# Altium PCB CAMERA.PcbDoc (part 1 of 2)
Units mm, origin at the board's own origin, x right, y up, seen from the top; angles counter-clockwise.
Board outline 40.01 x 40 mm, 8 copper layers (L1-TOP, L2-GND/PWR, L3-GND, L4-SIGNAL, L5-SIGNAL, L6-GND, L7-GND/PWR, L8-BOT), stack 1.6 mm thick; 313 components, 254 nets, 1654 pads, 0 vias.
Unrouted connection lines stored in the file: 1132.
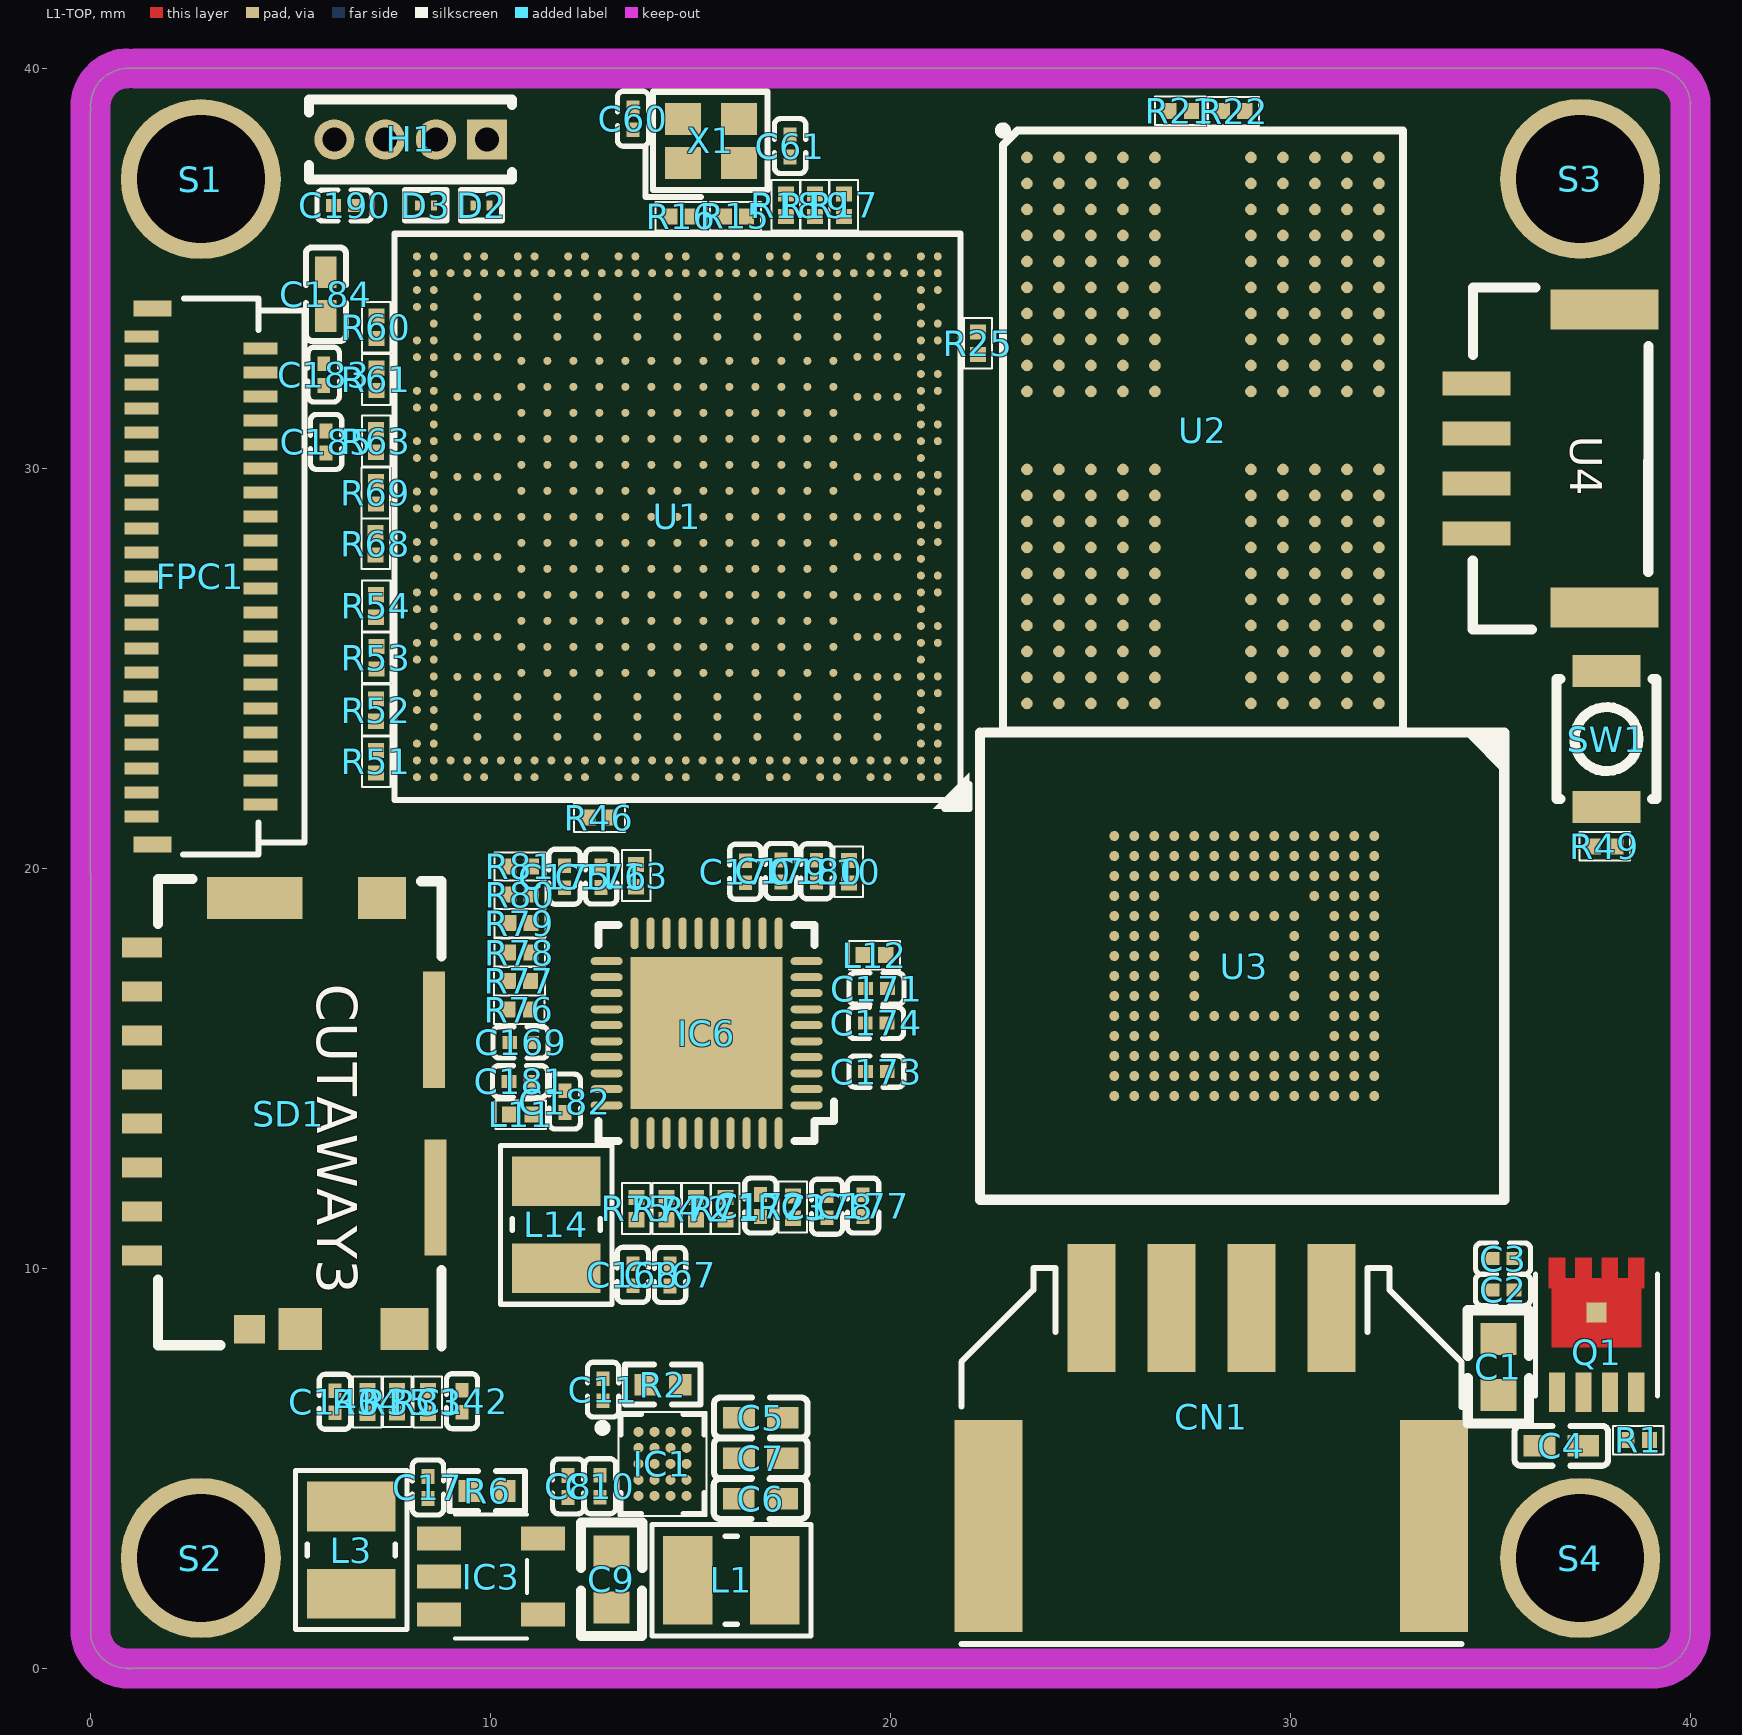
[diagram p0: L1-TOP view]
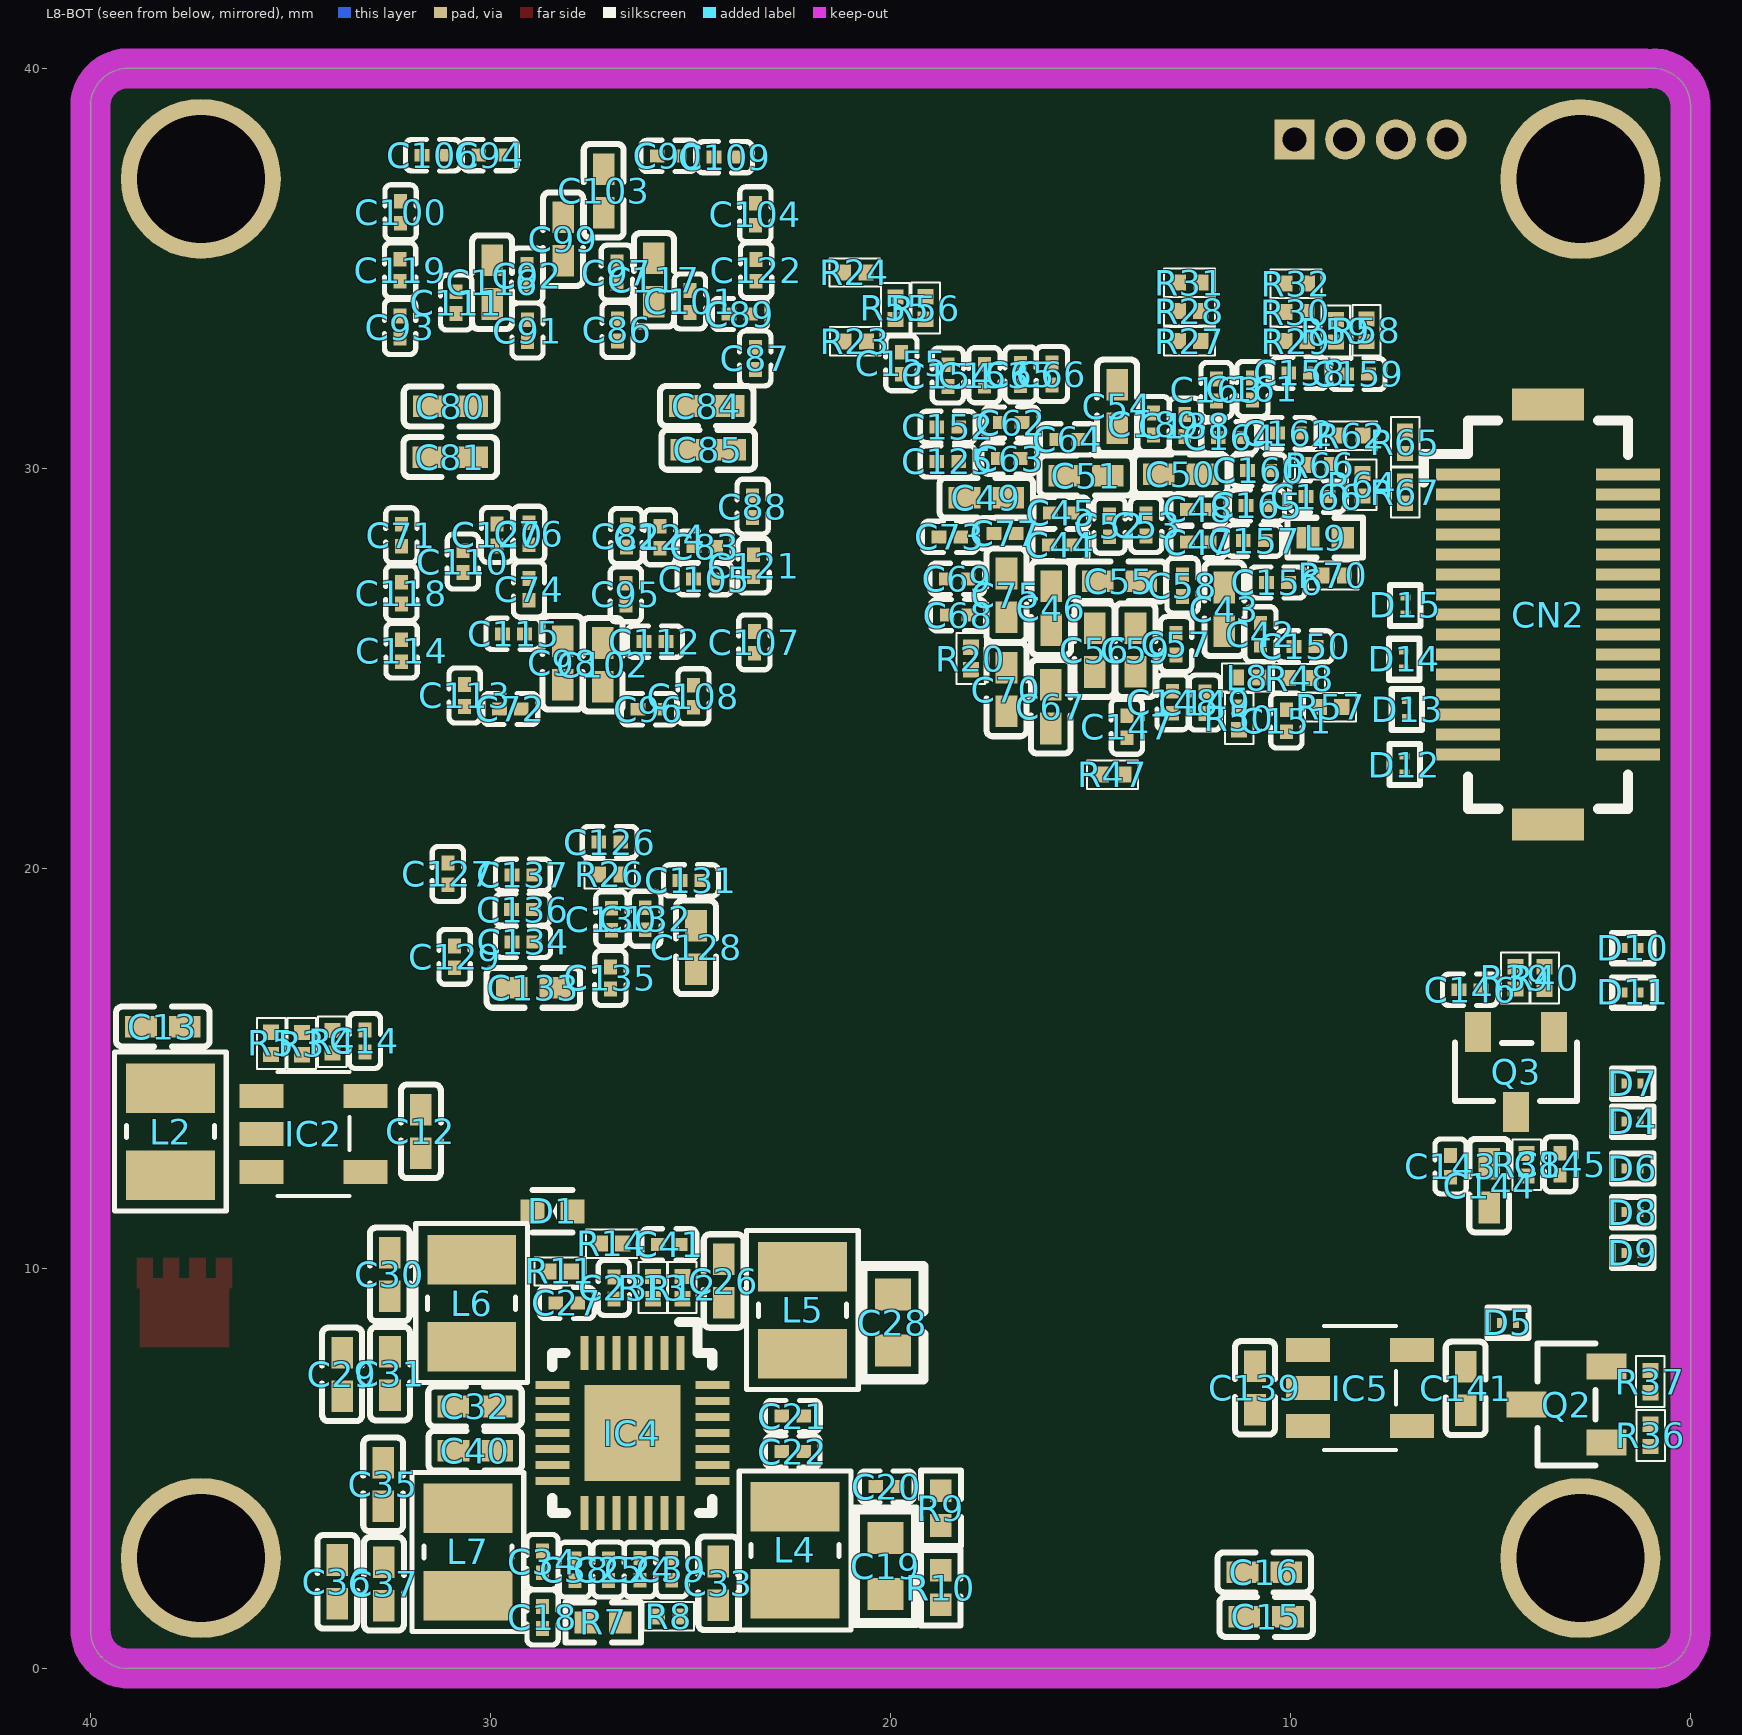
[diagram p1: L8-BOT view, seen from below]

## Layer stack, top to bottom
Top Solder: solder mask 0.0102, Solder Resist, Dk 3.5
L1-TOP: signal copper 0.035
Dielectric 1: prepreg 0.1164, 2116*1, Dk 4.1
L2-GND/PWR: signal copper 0.0152
Dielectric 2: core 0.3, Core-030, Dk 4.3
L3-GND: signal copper 0.0152
Dielectric 3: prepreg 0.0764, 1080*1, Dk 4.1
Dielectric 4: prepreg 0.0764, 1080*1, Dk 4.1
L4-SIGNAL: signal copper 0.0152
Dielectric 5: core 0.3, Core-030, Dk 4.3
L5-SIGNAL: signal copper 0.0152
Dielectric 6: prepreg 0.0764, 1080*1, Dk 4.1
Dielectric 7: prepreg 0.0764, 1080*1, Dk 4.1
L6-GND: signal copper 0.0152
Dielectric 8: core 0.3, Core-030, Dk 4.3
L7-GND/PWR: signal copper 0.0152
Dielectric 9: dielectric 0.1164, 2116*1, Dk 4.8
L8-BOT: signal copper 0.035
Bottom Solder: solder mask 0.0102, Solder Resist, Dk 3.5

## Board outline
0,0.889 ccw(c0.953,0.953) 1.016,0 0.884,0.005 39.111,0.005 39.106,0 ccw(c39.042,0.953) 39.995,1.016 39.995,39.204 40.005,39.116 ccw(c39.052,39.052) 38.989,40.005 0.889,40.005 ccw(c0.952,39.052) 0,38.989 -0.005,38.857

## Design rules (kind name [scope] priority, off if disabled: settings)
Clearance [All] p1: gap=0.254 ignorepadtopadclearanceinfootprint=TRUE
DiffPairsRouting [All] p1: maxlimit=0.254 minlimit=0.254 mostfreqgap=0.254 toplayer_minwidth=0.381 toplayer_maxwidth=0.381 toplayer_prefwidth=0.381 midlayer1_minwidth=0.381 midlayer1_maxwidth=0.381 midlayer1_prefwidth=0.381 midlayer2_minwidth=0.381 midlayer2_maxwidth=0.381 midlayer2_prefwidth=0.381 midlayer3_minwidth=0.381 midlayer3_maxwidth=0.381 midlayer3_prefwidth=0.381 midlayer4_minwidth=0.381 midlayer4_maxwidth=0.381 midlayer4_prefwidth=0.381 midlayer5_minwidth=0.381 midlayer5_maxwidth=0.381 midlayer5_prefwidth=0.381 midlayer6_minwidth=0.381 midlayer6_maxwidth=0.381 midlayer6_prefwidth=0.381 bottomlayer_minwidth=0.381 bottomlayer_maxwidth=0.381 bottomlayer_prefwidth=0.381 maxuncoupledlength=12.7
PolygonConnect [All] p1: connectstyle=Relief reliefconductorwidth=0.254 reliefentries=4 polygonreliefangle="90 Angle" airgapwidth=0.254
RoutingVias [All] p1: holewidth=0.711 width=1.27 viastyle="Through Hole" minholewidth=0.711 minwidth=1.27 maxholewidth=0.711 maxwidth=1.27
SolderMaskExpansion [All] p1: expansion=0.102 istentingtop=FALSE
SupplyNets "Schematic Supply Nets_20" [InNet('3V3SYS')] p1: voltage=0.000
SupplyNets "Schematic Supply Nets_19" [InNet('5VIN')] p2: voltage=0.000
SupplyNets "Schematic Supply Nets_18" [InNet('VCC3V3_SD')] p3: voltage=0.000
SupplyNets "Schematic Supply Nets_17" [InNet('VDD_NPU')] p4: voltage=0.000
SupplyNets "Schematic Supply Nets_16" [InNet('DVDD10')] p5: voltage=0.000
SupplyNets "Schematic Supply Nets_15" [InNet('VDD_VEPU_LOGIC')] p6: voltage=0.000
SupplyNets "Schematic Supply Nets_14" [InNet('VCC_1V8A')] p7: voltage=0.000
SupplyNets "Schematic Supply Nets_13" [InNet('VCC3V3')] p8: voltage=0.000
SupplyNets "Schematic Supply Nets_12" [InNet('VCC0V6_DDR')] p9: voltage=0.000
SupplyNets "Schematic Supply Nets_11" [InNet('VCC_1V8')] p10: voltage=0.000
SupplyNets "Schematic Supply Nets_10" [InNet('RGMII_1V')] p11: voltage=0.000
SupplyNets "Schematic Supply Nets_9" [InNet('VCC_DDR')] p12: voltage=0.000
SupplyNets "Schematic Supply Nets_8" [InNet('VDD_ARM')] p13: voltage=0.000
SupplyNets "Schematic Supply Nets_7" [InNet('VCCIO_SD')] p14: voltage=0.000
SupplyNets "Schematic Supply Nets_6" [InNet('AVDD33')] p15: voltage=0.000
SupplyNets "Schematic Supply Nets_5" [InNet('5VSYS')] p16: voltage=0.000
SupplyNets "Schematic Supply Nets_4" [InNet('AVDD10')] p17: voltage=0.000
SupplyNets "Schematic Supply Nets_3" [InNet('GND')] p18: voltage=0.000
SupplyNets "Schematic Supply Nets_2" [InNet('VCC0V9')] p19: voltage=0.000
SupplyNets "Schematic Supply Nets_1" [InNet('0V9')] p20: voltage=0.000
SupplyNets "Schematic Supply Nets" [InNet('DVDD33')] p21: voltage=0.000
Width [All] p1: maxlimit=0.254 minlimit=0.254 preferedwidth=0.254
29 further rules are at their usual default settings.

## Classes and differential pairs
differential pair class USB_DIFF_90OHM: USB_DRD USB_HOST
differential pair class PHY_DIFF_100: MDI0 MDI1 MDI2 MDI3
differential pair class DIFF100_DDR_DQS: DDRA_DQS0 DDRA_DQS1 DDRB_DQS0 DDRB_DQS1
differential pair class DIFF100_DDR_CLK: DDRA_CLK DDRB_CLK
differential pair class CSI_DIFF_100OHM: MIPI_CSI_RX0_CLK0 MIPI_CSI_RX0_D0 MIPI_CSI_RX0_D1 MIPI_CSI_RX0_D2 MIPI_CSI_RX0_D3 MIPI_CSI_RX1_CLK0 MIPI_CSI_RX1_D0 MIPI_CSI_RX1_D1 MIPI_CSI_RX1_D2 MIPI_CSI_RX1_D3
net class USB_DIFF_CLASS: NetD12_2 NetD13_2 NetD14_2 NetD15_2 USB_DRD_N USB_DRD_P USB_HOST_N USB_HOST_P
net class SDMMC1_50OHM: SDMMC1_CLK SDMMC1_CMD SDMMC1_D0 SDMMC1_D1 SDMMC1_D2 SDMMC1_D3
net class SDIO_50OHM: SDMMC0_CLK SDMMC0_CMD SDMMC0_D0 SDMMC0_D1 SDMMC0_D2 SDMMC0_D3
net class MAC_50OHM: ETH_CLK_25M ETH_MDC_M0 ETH_MDIO ETH_RX0_M0 ETH_RX1_M0 ETH_RX2_M0 ETH_RX3_M0 ETH_RXCLK_M0 ETH_RXCTL_M0 ETH_TX0_M0 ETH_TX1_M0 ETH_TX2_M0 ETH_TX3_M0 ETH_TXCLK_M0 ETH_TXCTL_M0 RGMII_INT RSTB
net class EMMC_50OHM: EMMC_CLK EMMC_CMD EMMC_D0 EMMC_D1 EMMC_D2 EMMC_D3 EMMC_D4 EMMC_D5 EMMC_D6 EMMC_D7 NetR25_1
net class DIFF_PAIR_CLASS: DDRA_CLK_N DDRA_CLK_P DDRA_DQS0_N DDRA_DQS0_P DDRA_DQS1_N DDRA_DQS1_P DDRB_CLK_N DDRB_CLK_P DDRB_DQS0_N DDRB_DQS0_P DDRB_DQS1_N DDRB_DQS1_P
net class DDR_DM_50OHM: DDRA_DM0 DDRA_DM1 DDRB_DM0 DDRB_DM1
net class DDR_DATABIT_50OHM: DDRA_D0 DDRA_D1 DDRA_D2 DDRA_D3 DDRA_D4 DDRA_D5 DDRA_D6 DDRA_D7 DDRA_D8 DDRA_D9 DDRA_D10 DDRA_D11 DDRA_D12 DDRA_D13 DDRA_D14 DDRA_D15 DDRB_D0 DDRB_D1 DDRB_D2 DDRB_D3 DDRB_D4 DDRB_D5 DDRB_D6 DDRB_D7 DDRB_D8 DDRB_D9 DDRB_D10 DDRB_D11 DDRB_D12 DDRB_D13 DDRB_D14 DDRB_D15
net class DDR_CTRL_50OHM: DDRA_CKE0 DDRA_CKE1 DDRA_CS0 DDRA_CS1 DDRB_CKE0 DDRB_CKE1 DDRB_CS0 DDRB_CS1
net class DDR_A_50OHM: DDRA_A0 DDRA_A1 DDRA_A2 DDRA_A3 DDRA_A4 DDRA_A5 DDRB_A0 DDRB_A1 DDRB_A2 DDRB_A3 DDRB_A4 DDRB_A5
net class CSI_DIFF_CLASS: MIPI_CSI_RX0_CLK0_N MIPI_CSI_RX0_CLK0_P MIPI_CSI_RX0_D0_N MIPI_CSI_RX0_D0_P MIPI_CSI_RX0_D1_N MIPI_CSI_RX0_D1_P MIPI_CSI_RX0_D2_N MIPI_CSI_RX0_D2_P MIPI_CSI_RX0_D3_N MIPI_CSI_RX0_D3_P MIPI_CSI_RX1_CLK0_N MIPI_CSI_RX1_CLK0_P MIPI_CSI_RX1_D0_N MIPI_CSI_RX1_D0_P MIPI_CSI_RX1_D1_N MIPI_CSI_RX1_D1_P MIPI_CSI_RX1_D2_N MIPI_CSI_RX1_D2_P MIPI_CSI_RX1_D3_N MIPI_CSI_RX1_D3_P
component class "USB 2.0 CONTROLLER": C152 C153 C154 C155 D12 D13 D14 D15 R51 R52 R53 R54 R55 R56
component class "SDRAM RV1126B": C67 C68 C69 C70 C73 C75 C77 R20
component class "SDMMC RV1126B": C138 C139 C140 C141 C142 IC5 Q2 R27 R28 R29 R30 R31 R32 R33 R34 R35 R36 R37
component class SDMMC1: C147 R46 R47
component class SDCARD: C143 C144 C145 C146 D4 D5 D6 D7 D8 D9 D10 D11 Q3 R38 R39 R40 SD1
component class SARADC: C148 C149 C150 C151 L8 R48 R49 R50 SW1
component class "RV1126B EMMC": C125 R23 R24 R25
component class RGMII: C165 C166 L9 R62 R63 R64 R65 R66 R67 R68 R69 R70
component class RGMII_PHY: C167 C168 C169 C170 C171 C172 C173 C174 C175 C176 C177 C178 C179 C180 C181 C182 IC6 L10 L11 L12 L13 L14 R71 R72 R73 R74 R75 R76 R77 R78 R79 R80 R81
component class PWR_IN: C1 C2 C3 C4 C5 C6 C7 C8 C9 C10 C11 C12 C13 C14 C15 C16 C17 CN1 D1 IC1 IC2 IC3 L1 L2 L3 Q1 R1 R2 R3 R4 R5 R6
component class "Power Pins Page RV1126": C42 C43 C44 C45 C46 C47 C48 C49 C50 C51 C52 C53 C54 C55 C56 C57 C58 C59
component class PMUIO_BLOCK: C60 C61 C62 C63 C64 C65 C66 C190 D2 D3 H1 R15 R16 R17 R18 R19 X1
component class PMIC: C18 C19 C20 C21 C22 C23 C24 C25 C26 C27 C28 C29 C30 C31 C32 C33 C34 C35 C36 C37 C38 C39 C40 C41 IC4 L4 L5 L6 L7 R7 R8 R9 R10 R11 R12 R13 R14
component class OTHER: C189 S1 S2 S3 S4 U1
component class MIPI_CSI: C158 C159 C160 C161 C162 C163 C164 R58 R59 R60 R61
component class "LPDDR4X SDRAM": C71 C72 C74 C76 C80 C81 C82 C83 C84 C85 C86 C87 C88 C89 C90 C91 C92 C93 C94 C95 C96 C97 C98 C99 C100 C101 C102 C103 C104 C105 C106 C107 C108 C109 C110 C111 C112 C113 C114 C115 C116 C117 C118 C119 C120 C121 C122 C124 R21 R22 U2
component class "EMMC CHIP": C126 C127 C128 C129 C130 C131 C132 C133 C134 C135 C136 C137 R26 U3
component class Connector: C183 C184 C185 CN2 FPC1
component class CANFD: C156 C157 R57 U4
differential pair USB_HOST: +USB_HOST_P -USB_HOST_N
differential pair USB_DRD: +USB_DRD_P -USB_DRD_N
differential pair MIPI_CSI_RX1_D3: +MIPI_CSI_RX1_D3_P -MIPI_CSI_RX1_D3_N
differential pair MIPI_CSI_RX1_D2: +MIPI_CSI_RX1_D2_P -MIPI_CSI_RX1_D2_N
differential pair MIPI_CSI_RX1_D1: +MIPI_CSI_RX1_D1_P -MIPI_CSI_RX1_D1_N
differential pair MIPI_CSI_RX1_D0: +MIPI_CSI_RX1_D0_P -MIPI_CSI_RX1_D0_N
differential pair MIPI_CSI_RX1_CLK0: +MIPI_CSI_RX1_CLK0_P -MIPI_CSI_RX1_CLK0_N
differential pair MIPI_CSI_RX0_D3: +MIPI_CSI_RX0_D3_P -MIPI_CSI_RX0_D3_N
differential pair MIPI_CSI_RX0_D2: +MIPI_CSI_RX0_D2_P -MIPI_CSI_RX0_D2_N
differential pair MIPI_CSI_RX0_D1: +MIPI_CSI_RX0_D1_P -MIPI_CSI_RX0_D1_N
differential pair MIPI_CSI_RX0_D0: +MIPI_CSI_RX0_D0_P -MIPI_CSI_RX0_D0_N
differential pair MIPI_CSI_RX0_CLK0: +MIPI_CSI_RX0_CLK0_P -MIPI_CSI_RX0_CLK0_N
differential pair MDI3: +MDI3_P -MDI3_N
differential pair MDI2: +MDI2_P -MDI2_N
differential pair MDI1: +MDI1_P -MDI1_N
differential pair MDI0: +MDI0_P -MDI0_N
differential pair DDRB_DQS1: +DDRB_DQS1_P -DDRB_DQS1_N
differential pair DDRB_DQS0: +DDRB_DQS0_P -DDRB_DQS0_N
differential pair DDRB_CLK: +DDRB_CLK_P -DDRB_CLK_N
differential pair DDRA_DQS1: +DDRA_DQS1_P -DDRA_DQS1_N
differential pair DDRA_DQS0: +DDRA_DQS0_P -DDRA_DQS0_N
differential pair DDRA_CLK: +DDRA_CLK_P -DDRA_CLK_N

## Components (designator, comment, footprint, x,y, rotation, side; value= is the part's Value field where it differs from the comment)
C1 "22uF" C0603 35.194,7.538 r90 top
C2 "0.1uF" C0201 35.312,9.466 r0 top
C3 "1uF" C0201 35.313,10.248 r0 top
C4 "4.7uF" C0402#1 36.77,5.569 r180 top
C5 "22uF" C0402#1 16.756,6.273 r0 top
C6 "22uF" C0402#1 16.75,4.242 r0 top
C7 "22uF" C0402#1 16.756,5.257 r0 top
C8 "0.1uF" C0201 11.942,4.553 r270 top
C9 "22uF" C0603 13.023,2.232 r90 top
C10 "0.1uF" C0201 12.742,4.558 r270 top
C11 "0.1uF" C0201 12.814,6.972 r90 top
C12 "10uF" C0402#2 31.741,13.429 r270 bottom
C13 "22uF" C0402#2 38.194,16.048 r180 bottom
C14 "22pF" C0201 33.141,15.689 r90 bottom
C15 "10uF" C0402#2 10.608,1.291 r0 bottom
C16 "22uF" C0402#2 10.655,2.404 r0 bottom
C17 "0.1uF" C0201 8.435,4.526 r270 top
C18 "0.1uF" C0201 28.7,1.276 r270 bottom
C19 "22uF" C0603 20.125,2.56 r270 bottom
C20 "47pF" C0201 20.096,4.549 r180 bottom
C21 "1uF" C0201 22.445,6.31 r0 bottom
C22 "1uF" C0201 22.447,5.421 r0 bottom
C23 "1uF" C0201 26.918,9.515 r270 bottom
C24 "1uF" C0201 26.267,2.479 r90 bottom
C25 "1uF" C0201 27.049,2.473 r90 bottom
C26 "10uF" C0402#2 24.171,9.688 r270 bottom
C27 "1uF" C0201 28.094,9.142 r180 bottom
C28 "22uF" C0603 19.941,8.647 r90 bottom
C29 "22uF" C0402#2 33.71,7.354 r90 bottom
C30 "22uF" C0402#2 32.517,9.854 r270 bottom
C31 "22uF" C0402#2 32.513,7.372 r90 bottom
C32 "10uF" C0402#2 30.387,6.552 r0 bottom
C33 "10uF" C0402#2 24.307,2.13 r90 bottom
C34 "0.1uF" C0201 28.7,2.665 r90 bottom
C35 "22uF" C0402#2 32.682,4.602 r270 bottom
C36 "22uF" C0402#2 33.83,2.167 r90 bottom
C37 "22uF" C0402#2 32.667,2.116 r90 bottom
C38 "1uF" C0201 27.89,2.471 r90 bottom
C39 "1uF" C0201 25.469,2.48 r90 bottom
C40 "10uF" C0402#2 30.38,5.445 r0 bottom
C41 "1uF" C0201 25.531,10.606 r0 bottom
C42 "0.1uF" C0201 10.751,25.857 r90 bottom
C43 "10uF" C0402#2 11.656,26.48 r90 bottom
C44 "1uF" C0201 15.751,28.09 r0 bottom
C45 "0.1uF" C0201 15.729,28.893 r0 bottom
C46 "10uF" C0402#2 15.982,26.507 r90 bottom
C47 "1uF" C0201 12.303,28.158 r0 bottom
C48 "0.1uF" C0201 12.303,28.978 r0 bottom
C49 "10uF" C0402#2 17.604,29.268 r180 bottom
C50 "10uF" C0402#2 12.746,29.856 r0 bottom
C51 "4.7uF" C0402#2 15.11,29.824 r180 bottom
C52 "1uF" C0201 14.524,28.57 r90 bottom
C53 "0.1uF" C0201 13.608,28.587 r90 bottom
C54 "10uF" C0402#2 14.335,31.552 r270 bottom
C55 "10uF" C0402#2 14.278,27.18 r0 bottom
C56 "10uF" C0402#2 14.899,25.458 r90 bottom
C57 "1uF" C0201 12.86,25.611 r90 bottom
C58 "0.1uF" C0201 12.699,27.072 r90 bottom
C59 "10uF" C0402#2 13.875,25.46 r90 bottom
C60 "15pF" C0201 13.563,38.745 r270 top
C61 "15pF" C0201 17.491,38.062 r270 top
C62 "1uF" C0201 16.985,31.146 r180 bottom
C63 "0.1uF" C0201 17.029,30.25 r180 bottom
C64 "0.1uF" C0201 15.57,30.731 r0 bottom
C65 "0.1uF" C0201 16.746,32.351 r270 bottom
C66 "0.1uF" C0201 15.965,32.362 r270 bottom
C67 "10uF" C0402#2 15.994,24.046 r90 bottom
C68 "1uF" C0201 18.31,26.335 r180 bottom
C69 "0.1uF" C0201 18.334,27.242 r180 bottom
C70 "10uF" C0402#2 17.101,24.475 r90 bottom
C71 "0.1uF" C0201 32.23,28.331 r90 bottom
C72 "0.1uF" C0201 29.504,23.989 r0 bottom
C73 "0.1uF" C0201 18.517,28.293 r180 bottom
C74 "0.1uF" C0201 29.038,26.979 r90 bottom
C75 "10uF" C0402#2 17.101,26.83 r90 bottom
C76 "0.1uF" C0201 29.037,28.371 r90 bottom
C77 "0.1uF" C0201 17.137,28.381 r180 bottom
C80 "22uF" C0402#2 31,31.552 r0 bottom
C81 "10uF" C0402#2 31.006,30.286 r0 bottom
C82 "1uF" C0201 26.605,28.313 r90 bottom
C83 "0.1uF" C0201 24.642,28.045 r180 bottom
C84 "22uF" C0402#2 24.593,31.562 r180 bottom
C85 "10uF" C0402#2 24.556,30.468 r180 bottom
C86 "1uF" C0201 26.826,33.463 r90 bottom
C87 "0.1uF" C0201 23.381,32.753 r90 bottom
C88 "0.1uF" C0201 23.446,29.047 r270 bottom
C89 "0.1uF" C0201 23.767,33.863 r0 bottom
C90 "0.1uF" C0201 25.555,37.815 r0 bottom
C91 "0.1uF" C0201 29.075,33.448 r270 bottom
C92 "0.1uF" C0201 29.084,34.824 r270 bottom
C93 "0.1uF" C0201 32.262,33.537 r270 bottom
C94 "0.1uF" C0201 30.021,37.837 r180 bottom
C95 "0.1uF" C0201 26.616,26.855 r90 bottom
C96 "0.1uF" C0201 26.041,23.982 r180 bottom
C97 "0.1uF" C0201 26.841,34.898 r270 bottom
C98 "22uF" C0402#2 28.199,25.139 r270 bottom
C99 "10uF" C0402#2 28.186,35.736 r90 bottom
C100 "1uF" C0201 32.249,36.406 r270 bottom
C101 "0.1uF" C0201 25.014,34.178 r90 bottom
C102 "22uF" C0402#2 27.196,25.093 r270 bottom
C103 "10uF" C0402#2 27.17,36.941 r270 bottom
C104 "1uF" C0201 23.378,36.356 r270 bottom
C105 "0.1uF" C0201 24.651,27.235 r0 bottom
C106 "0.1uF" C0201 31.44,37.832 r180 bottom
C107 "0.1uF" C0201 23.405,25.654 r90 bottom
C108 "0.1uF" C0201 24.926,24.305 r90 bottom
C109 "0.1uF" C0201 24.141,37.783 r0 bottom
C110 "0.1uF" C0201 30.69,27.673 r270 bottom
C111 "0.1uF" C0201 30.858,34.147 r90 bottom
C112 "0.1uF" C0201 25.89,25.673 r0 bottom
C113 "0.1uF" C0201 30.646,24.326 r90 bottom
C114 "0.1uF" C0201 32.221,25.447 r90 bottom
C115 "0.1uF" C0201 29.425,25.867 r180 bottom
C116 "22uF" C0402#2 29.961,34.659 r270 bottom
C117 "10uF" C0402#2 25.917,34.716 r270 bottom
C118 "1uF" C0201 32.23,26.884 r90 bottom
C119 "0.1uF" C0201 32.259,34.955 r270 bottom
C120 "0.1uF" C0201 29.837,28.34 r270 bottom
C121 "0.1uF" C0201 23.422,27.572 r270 bottom
C122 "0.1uF" C0201 23.36,34.954 r270 bottom
C124 "0.1uF" C0201 25.763,28.282 r270 bottom
C125 "0.1uF" C0201 18.568,30.179 r180 bottom
C126 "0.1uF" C0201 27.019,20.663 r0 bottom
C127 "0.1uF" C0201 31.066,19.866 r90 bottom
C128 "10uF" C0402#2 24.863,18.027 r90 bottom
C129 "1uF" C0201 30.897,17.792 r90 bottom
C130 "0.1uF" C0201 26.977,18.732 r90 bottom
C131 "0.1uF" C0201 24.991,19.703 r0 bottom
C132 "0.1uF" C0201 26.132,18.743 r90 bottom
C133 "10uF" C0402#2 28.928,17.018 r180 bottom
C134 "1uF" C0201 29.187,18.163 r0 bottom
C135 "0.1uF" C0201 27.001,17.264 r270 bottom
C136 "0.1uF" C0201 29.199,18.973 r0 bottom
C137 "0.1uF" C0201 29.192,19.842 r0 bottom
C138 "0.1uF" C0201 12.644,31.074 r270 bottom
C139 "4.7uF" C0402#2 10.889,7.016 r90 bottom
C140 "1nF" C0201 6.109,6.668 r90 top
C141 "4.7uF" C0402#2 5.621,7.004 r270 bottom
C142 "1nF" C0201 9.287,6.684 r270 top
C143 "0.1uF" C0201 5.999,12.553 r90 bottom
C144 "4.7uF" C0402#2 5.033,12.071 r90 bottom
C145 "0.1uF" C0201 3.26,12.606 r90 bottom
C146 "0.1uF" C0201 5.512,16.969 r0 bottom
C147 "0.1uF" C0201 14.092,23.544 r90 bottom
C148 "0.1uF" C0201 12.947,24.157 r90 bottom
C149 "1uF" C0201 12.139,24.148 r270 bottom
C150 "1nF" C0201 9.639,25.552 r0 bottom
C151 "1nF" C0201 10.102,23.697 r270 bottom
C152 "0.1uF" C0201 18.57,31.04 r180 bottom
C153 "0.1uF" C0201 17.654,32.334 r270 bottom
C154 "0.1uF" C0201 18.568,32.323 r270 bottom
C155 "0.1uF" C0201 19.729,32.631 r90 bottom
C156 "0.1uF" C0201 10.326,27.151 r0 bottom
C157 "0.1uF" C0201 10.907,28.198 r0 bottom
C158 "0.1uF" C0201 9.773,32.39 r0 bottom
C159 "0.1uF" C0201 8.326,32.365 r180 bottom
C160 "0.1uF" C0201 10.799,29.956 r0 bottom
C161 "0.1uF" C0201 10.953,31.989 r270 bottom
C162 "0.1uF" C0201 10.053,30.884 r0 bottom
C163 "0.1uF" C0201 11.851,31.964 r270 bottom
C164 "0.1uF" C0201 11.531,30.779 r0 bottom
C165 "0.1uF" C0201 10.838,29.076 r0 bottom
C166 "0.1uF" C0201 9.34,29.3 r0 bottom
C167 "1uF" C0201 14.488,9.84 r270 top
C168 "0.1uF" C0201 13.557,9.843 r270 top
C169 "0.1uF" C0201 10.753,15.654 r0 top
C170 "0.1uF" C0201 16.369,19.92 r90 top
C171 "1uF" C0201 19.65,16.997 r180 top
C172 "0.1uF" C0201 16.746,11.574 r90 top
C173 "0.1uF" C0201 19.646,14.924 r180 top
C174 "0.1uF" C0201 19.64,16.141 r180 top
C175 "0.1uF" C0201 11.853,19.796 r270 top
C176 "1uF" C0201 12.767,19.798 r270 top
C177 "1uF" C0201 19.316,11.572 r90 top
C178 "0.1uF" C0201 18.412,11.545 r90 top
C179 "1uF" C0201 17.265,19.939 r270 top
C180 "0.1uF" C0201 18.15,19.932 r270 top
C181 "0.1uF" C0201 10.738,14.68 r0 top
C182 "1uF" C0201 11.857,14.173 r90 top
C183 "0.1uF" C0201 5.831,32.347 r90 top
C184 "10uF" C0402#1 5.885,34.359 r270 top
C185 "0.1uF" C0201 5.891,30.664 r270 top
C189 "0.1uF" C0201 13.424,31.112 r90 bottom
C190 "0.1uF" C0201 6.35,36.576 r0 top
CN1 "SMD,P=2mm,Surface Mount,Right Angle" CONN-SMD_4P-P2.00_WTBA0-BH004 28.02,6.29 r180 top
CN2 "DF12NB(3.0)-30DP-0.5V(51)" CONN-SMD_30P-P0.50_HRS_DF12NB-3.0-30DP-0.5V 3.569,26.346 r270 bottom
D1 "TVS DIODE 5VWM 10VC X1-SON-2(0.6x1)" X1SON-2_L1.0-W0.6-P0.65-BI-1 28.448,11.43 r180 bottom
D2 "ESD DIODE" DSN0603-2_L0.7-W0.3-P0.40-BI 9.779,36.576 r0 top
D3 "ESD DIODE" DSN0603-2_L0.7-W0.3-P0.40-BI 8.382,36.576 r0 top
D4 "ESD DIODE" DSN0603-2_L0.7-W0.3-P0.40-BI 1.446,13.67 r0 bottom
D5 "ESD DIODE" DSN0603-2_L0.7-W0.3-P0.40-BI 4.565,8.644 r180 bottom
D6 "ESD DIODE" DSN0603-2_L0.7-W0.3-P0.40-BI 1.446,12.505 r0 bottom
D7 "ESD DIODE" DSN0603-2_L0.7-W0.3-P0.40-BI 1.446,14.624 r0 bottom
D8 "ESD DIODE" DSN0603-2_L0.7-W0.3-P0.40-BI 1.446,11.412 r0 bottom
D9 "ESD DIODE" DSN0603-2_L0.7-W0.3-P0.40-BI 1.446,10.394 r0 bottom
D10 "ESD DIODE" DSN0603-2_L0.7-W0.3-P0.40-BI 1.446,18.016 r0 bottom
D11 "ESD DIODE" DSN0603-2_L0.7-W0.3-P0.40-BI 1.446,16.903 r0 bottom
D12 "ESD DIODE" DSN0603-2_L0.7-W0.3-P0.40-BI 7.151,22.599 r270 bottom
D13 "ESD DIODE" DSN0603-2_L0.7-W0.3-P0.40-BI 7.086,23.982 r90 bottom
D14 "ESD DIODE" DSN0603-2_L0.7-W0.3-P0.40-BI 7.161,25.229 r270 bottom
D15 "ESD DIODE" DSN0603-2_L0.7-W0.3-P0.40-BI 7.128,26.576 r90 bottom
FPC1 "FH35C-41S-0.3SHW(50)" FPC-SMD_FH35C-41S-0.3SHW-50 2.746,27.305 r270 top
H1 "Through Hole,P=1.27mm" HDR-TH_4P-P1.27-V-M 8.001,38.227 r180 top
IC1 "SYR838PKC" BGA-20_L15.6-W2.0-R4-C6-P0.40-BL 14.299,5.118 r270 top
IC2 "SY8089A1AAC" SOT-23-5_L3.0-W1.7-P0.95-LS2.8-BR 34.425,13.364 r0 bottom
IC3 "SY8089A1AAC" SOT-23-5_L3.0-W1.7-P0.95-LS2.8-BR 10.012,2.297 r180 top
IC4 "RK801-2" QFN-28_L4.0-W4.0-P0.40-TL-EP2.4 26.456,5.887 r270 bottom
IC5 "LP3983SAB5F-08" SOT-23-5_L3.0-W1.7-P0.95-LS2.8-BR 8.258,7.01 r0 bottom
IC6 "RTL8211F-CG" WQFN-40_L5.0-W5.0-P0.4-BL-EP 15.403,15.882 r90 top
L1 "FTC252012SR47MBCA" IND_1008 16.018,2.206 r0 top
L2 "APH252012C1R0MP01" IND_1008 37.999,13.421 r90 bottom
L3 "APH252012C1R0MP01" IND_1008 6.518,2.96 r90 top
L4 "FTC252012SR47MBCA" IND_1008 22.39,2.955 r270 bottom
L5 "FTC252012SR47MBCA" IND_1008 22.199,8.958 r90 bottom
L6 "PSTMAA252012-2R2MB" IND_1008 30.471,9.132 r90 bottom
L7 "PSTMAA252012-2R2MB" IND_1008 30.567,2.914 r270 bottom
L8 "FERRITE BEAD 120Ω 0201 1LN" R0201 11.077,24.776 r0 bottom
L9 "FERRITE BEAD 120Ω 0201 1LN" R0402 9.129,28.27 r180 bottom
L10 "FERRITE BEAD 120Ω 0201 1LN" R0201 18.957,19.92 r270 top
L11 "FERRITE BEAD 120Ω 0201 1LN" R0201 10.754,13.847 r0 top
L12 "FERRITE BEAD 120Ω 0201 1LN" R0201 19.6,17.837 r180 top
L13 "FERRITE BEAD 120Ω 0201 1LN" R0201 13.638,19.822 r270 top
L14 "PSTMAA252012-2R2MB" IND_1008 11.644,11.096 r270 top
Q1 "SI7615CDN-T1-GE3" PowerPAK_1212-8_SMD 37.653,7.901 r90 top
Q2 "N-CHANEL" SOT-23-3_L2.9-W1.3-P1.90-LS2.4-BR 3.097,6.6 r180 bottom
Q3 "P-CHANNEL" SOT-23-3_L2.9-W1.3-P1.90-LS2.4-BR 4.361,14.919 r90 bottom
R1 "200KΩ" R0201 38.691,5.709 r180 top
R2 "23.7kΩ" R0402 14.31,7.097 r0 top
R3 "200KΩ" R0201 34.716,15.623 r270 bottom
R4 "100KΩ" R0201 33.956,15.668 r90 bottom
R5 "10KΩ" R0201 35.487,15.628 r270 bottom
R6 "23.7kΩ" R0402 9.914,4.438 r0 top
R7 "2.2MΩ" R0402 27.185,1.151 r0 bottom
R8 "1MΩ" R0201 25.543,1.304 r0 bottom
R9 "96.5kΩ" R0402 18.74,4.007 r90 bottom
R10 "49.9kΩ" R0402 18.745,2.024 r90 bottom
R11 "4.7kΩ" R0201 28.263,9.926 r0 bottom
R12 "4.7kΩ" R0201 25.206,9.524 r90 bottom
R13 "4.7kΩ" R0201 25.943,9.522 r90 bottom
R14 "4.7KΩ" R0201 26.974,10.621 r0 bottom
R15 "30Ω" R0201 16.121,36.304 r0 top
R16 "1MΩ" R0201 14.764,36.304 r180 top
R17 "510Ω" R0201 18.834,36.583 r90 top
R18 "510Ω" R0201 17.383,36.583 r90 top
R19 "100Ω" R0201 18.108,36.583 r90 top
R20 "120Ω" R0201 17.991,25.25 r270 bottom
R21 "240Ω" R0201 27.244,38.939 r180 top
R22 "240Ω" R0201 28.575,38.935 r0 top
R23 "4.7KΩ" R0201 20.88,33.181 r180 bottom
R24 "4.7KΩ" R0201 20.896,34.901 r180 bottom
R25 "22Ω" R0201 22.187,33.133 r90 top
R26 "10kΩ" R0201 27.019,19.856 r180 bottom
R27 "22Ω" R0201 12.523,33.187 r180 bottom
R28 "22Ω" R0201 12.523,33.932 r180 bottom
R29 "22Ω" R0201 9.86,33.187 r0 bottom
R30 "22Ω" R0201 9.866,33.909 r180 bottom
R31 "22Ω" R0201 12.523,34.645 r0 bottom
R32 "22Ω" R0201 9.861,34.625 r0 bottom
R33 "10kΩ" R0201 8.436,6.663 r270 top
R34 "127KΩ" R0201 6.922,6.664 r90 top
R35 "100KΩ" R0201 7.665,6.668 r270 top
R36 "10kΩ" R0201 0.996,5.829 r90 bottom
R37 "100KΩ" R0201 1.004,7.173 r270 bottom
R38 "10kΩ" R0201 4.099,12.596 r90 bottom
R39 "100KΩ" R0201 4.382,17.265 r90 bottom
R40 "10kΩ" R0201 3.648,17.263 r270 bottom
R46 "22Ω" R0201 12.721,21.271 r0 top
R47 "10kΩ" R0201 14.451,22.35 r0 bottom
R48 "10kΩ" R0201 9.774,24.758 r180 bottom
R49 "100Ω" R0201 37.856,20.552 r0 top
R50 "10kΩ" R0201 11.286,23.751 r270 bottom
R51 "2.2Ω" R0201 7.142,22.669 r90 top
R52 "2.2Ω" R0201 7.139,23.961 r270 top
R53 "2.2Ω" R0201 7.145,25.27 r90 top
R54 "2.2Ω" R0201 7.142,26.562 r270 top
R55 "10kΩ" R0201 19.877,34.007 r90 bottom
R56 "15kΩ" R0201 19.121,34.012 r270 bottom
R57 "4.7KΩ" R0201 8.998,24.037 r180 bottom
R58 "4.7KΩ" R0201 8.101,33.458 r90 bottom
R59 "4.7KΩ" R0201 8.869,33.44 r90 bottom
R60 "22Ω" R0201 7.143,33.532 r90 top
R61 "22Ω" R0201 7.147,32.228 r270 top
R62 "0Ω" R0201 8.476,30.825 r180 bottom
R63 "0Ω" R0201 7.14,30.687 r270 top
R64 "0Ω" R0201 8.206,29.596 r270 bottom
R65 "0Ω" R0201 7.136,30.655 r90 bottom
R66 "0Ω" R0201 9.254,30.084 r180 bottom
R67 "0Ω" R0201 7.133,29.411 r90 bottom
R68 "0Ω" R0201 7.127,28.119 r270 top
R69 "0Ω" R0201 7.132,29.391 r90 top
R70 "1.5kΩ" R0201 8.931,27.326 r180 bottom
R71 "4.7KΩ" R0201 15.873,11.498 r90 top
R72 "4.7KΩ" R0201 15.141,11.498 r90 top
R73 "2.49kΩ" R0201 17.557,11.535 r270 top
R74 "4.7KΩ" R0201 14.401,11.498 r270 top
R75 "0Ω" R0201 13.648,11.498 r270 top
R76 "22Ω" R0201 10.718,16.469 r180 top
R77 "22Ω" R0201 10.721,17.186 r180 top
R78 "22Ω" R0201 10.732,17.9 r180 top
R79 "22Ω" R0201 10.734,18.635 r180 top
R80 "22Ω" R0201 10.738,19.348 r180 top
R81 "22Ω" R0201 10.74,20.051 r180 top
S1 "Screw" "SCREW 3.0" 2.756,37.232 r0 top
S2 "Screw" "SCREW 3.0" 2.756,2.762 r0 top
S3 "Screw" "SCREW 3.0" 37.24,37.24 r0 top
S4 "Screw" "SCREW 3.0" 37.24,2.762 r0 top
SD1 "SD CARD" CONN-SMD_1051620101 4.762,13.895 r270 top
SW1 "B3U-1000P" KEY-SMD_B3U-1000PM 37.902,23.236 r90 top
U1 "IC_RV1126B_C52941026" CCSP-491_L14.0-W14.0-TL_RV1126B 14.671,28.793 r180 top
U2 "AS4C1G32MD4V-046BIN" BGA200C65P12X22_1000X1500X100 27.811,30.952 r0 top
U3 "emmc 16gb" FBGA-153_L13.0-W11.5-P0.50_KLMAG1JETD-B041 28.844,17.562 r270 top
U4 "SM04B-GHS-TB(LF)(SN)" CONN-SMD_4P-P1.25_SM04B-GHS-TB-LF-SN 36.244,30.249 r90 top
X1 "24MHz" CRYSTAL-SMD_4P-L2.0-W1.6-BL 15.507,38.191 r0 top

## Footprints (in the part's own frame and the unit in brackets; to place one, negate y for a bottom-side part, rotate by r counter-clockwise, add the part's x,y. Pads: shape width x height; smd on the part's side, far side on the other; paste and mask are expansions set on the pad)
BGA200C65P12X22_1000X1500X100 [mm]
  round 0.29 smd: A1(-4.4,6.825) A2(-3.6,6.825) A3(-2.8,6.825) A4(-2,6.825) A5(-1.2,6.825) A8(1.2,6.825) A9(2,6.825) A10(2.8,6.825) A11(3.6,6.825) A12(4.4,6.825) AA1(-4.4,-6.175) AA2(-3.6,-6.175) AA3(-2.8,-6.175) AA4(-2,-6.175) AA5(-1.2,-6.175) AA8(1.2,-6.175) AA9(2,-6.175) AA10(2.8,-6.175) AA11(3.6,-6.175) AA12(4.4,-6.175) AB1(-4.4,-6.825) AB2(-3.6,-6.825) AB3(-2.8,-6.825) AB4(-2,-6.825) AB5(-1.2,-6.825) AB8(1.2,-6.825) AB9(2,-6.825) AB10(2.8,-6.825) AB11(3.6,-6.825) AB12(4.4,-6.825) B1(-4.4,6.175) B2(-3.6,6.175) B3(-2.8,6.175) B4(-2,6.175) B5(-1.2,6.175) B8(1.2,6.175) B9(2,6.175) B10(2.8,6.175) B11(3.6,6.175) B12(4.4,6.175) C1(-4.4,5.525) C2(-3.6,5.525) C3(-2.8,5.525) C4(-2,5.525) C5(-1.2,5.525) C8(1.2,5.525) C9(2,5.525) C10(2.8,5.525) C11(3.6,5.525) C12(4.4,5.525) D1(-4.4,4.875) D2(-3.6,4.875) D3(-2.8,4.875) D4(-2,4.875) D5(-1.2,4.875) D8(1.2,4.875) D9(2,4.875) D10(2.8,4.875) D11(3.6,4.875) D12(4.4,4.875) E1(-4.4,4.225) E2(-3.6,4.225) E3(-2.8,4.225) E4(-2,4.225) E5(-1.2,4.225) E8(1.2,4.225) E9(2,4.225) E10(2.8,4.225) E11(3.6,4.225) E12(4.4,4.225) F1(-4.4,3.575) F2(-3.6,3.575) F3(-2.8,3.575) F4(-2,3.575) F5(-1.2,3.575) F8(1.2,3.575) F9(2,3.575) F10(2.8,3.575) F11(3.6,3.575) F12(4.4,3.575) G1(-4.4,2.925) G2(-3.6,2.925) G3(-2.8,2.925) G4(-2,2.925) G5(-1.2,2.925) G8(1.2,2.925) G9(2,2.925) G10(2.8,2.925) G11(3.6,2.925) G12(4.4,2.925) H1(-4.4,2.275) H2(-3.6,2.275) H3(-2.8,2.275) H4(-2,2.275) H5(-1.2,2.275) H8(1.2,2.275) H9(2,2.275) H10(2.8,2.275) H11(3.6,2.275) H12(4.4,2.275) J1(-4.4,1.625) J2(-3.6,1.625) J3(-2.8,1.625) J4(-2,1.625) J5(-1.2,1.625) J8(1.2,1.625) J9(2,1.625) J10(2.8,1.625) J11(3.6,1.625) J12(4.4,1.625) K1(-4.4,0.975) K2(-3.6,0.975) K3(-2.8,0.975) K4(-2,0.975) K5(-1.2,0.975) K8(1.2,0.975) K9(2,0.975) K10(2.8,0.975) K11(3.6,0.975) K12(4.4,0.975) N1(-4.4,-0.975) N2(-3.6,-0.975) N3(-2.8,-0.975) N4(-2,-0.975) N5(-1.2,-0.975) N8(1.2,-0.975) N9(2,-0.975) N10(2.8,-0.975) N11(3.6,-0.975) N12(4.4,-0.975) P1(-4.4,-1.625) P2(-3.6,-1.625) P3(-2.8,-1.625) P4(-2,-1.625) P5(-1.2,-1.625) P8(1.2,-1.625) P9(2,-1.625) P10(2.8,-1.625) P11(3.6,-1.625) P12(4.4,-1.625) R1(-4.4,-2.275) R2(-3.6,-2.275) R3(-2.8,-2.275) R4(-2,-2.275) R5(-1.2,-2.275) R8(1.2,-2.275) R9(2,-2.275) R10(2.8,-2.275) R11(3.6,-2.275) R12(4.4,-2.275) T1(-4.4,-2.925) T2(-3.6,-2.925) T3(-2.8,-2.925) T4(-2,-2.925) T5(-1.2,-2.925) T8(1.2,-2.925) T9(2,-2.925) T10(2.8,-2.925) T11(3.6,-2.925) T12(4.4,-2.925) U1(-4.4,-3.575) U2(-3.6,-3.575) U3(-2.8,-3.575) U4(-2,-3.575) U5(-1.2,-3.575) U8(1.2,-3.575) U9(2,-3.575) U10(2.8,-3.575) U11(3.6,-3.575) U12(4.4,-3.575) V1(-4.4,-4.225) V2(-3.6,-4.225) V3(-2.8,-4.225) V4(-2,-4.225) V5(-1.2,-4.225) V8(1.2,-4.225) V9(2,-4.225) V10(2.8,-4.225) V11(3.6,-4.225) V12(4.4,-4.225) W1(-4.4,-4.875) W2(-3.6,-4.875) W3(-2.8,-4.875) W4(-2,-4.875) W5(-1.2,-4.875) W8(1.2,-4.875) W9(2,-4.875) W10(2.8,-4.875) W11(3.6,-4.875) W12(4.4,-4.875) Y1(-4.4,-5.525) Y2(-3.6,-5.525) Y3(-2.8,-5.525) Y4(-2,-5.525) Y5(-1.2,-5.525) Y8(1.2,-5.525) Y9(2,-5.525) Y10(2.8,-5.525) Y11(3.6,-5.525) Y12(4.4,-5.525)
  silkscreen extent -5.1,-7.5 5,7.6, body extent -5,-7.25 5,7.25, height 0.95
BGA-20_L15.6-W2.0-R4-C6-P0.40-BL [mm]
  round 0.25 smd mask+0.076: A1(-0.8,-0.6) A2(-0.8,-0.2) A3(-0.8,0.2) A4(-0.8,0.6) B1(-0.4,-0.6) B2(-0.4,-0.2) B3(-0.4,0.2) B4(-0.4,0.6) C1(0,-0.6) C2(0,-0.2) C3(0,0.2) C4(0,0.6) D1(0.4,-0.6) D2(0.4,-0.2) D3(0.4,0.2) D4(0.4,0.6) E1(0.8,-0.6) E2(0.8,-0.2) E3(0.8,0.2) E4(0.8,0.6)
  silkscreen extent -1.3,-1.6 1.3,1.1, body extent -1.32,-1.12 1.32,1.12, height 0.56
C0201 [mm]
  rect 0.368x0.324 smd paste-100 mask+0.051: 1(-0.274,0) 2(0.274,0)
  silkscreen extent -0.69,-0.39 0.69,0.39, body extent -0.41,-0.15 0.47,0.15, height 0.31
C0402#1 [mm] "cap"
  rect 0.79x0.54 smd paste+0 mask+0.05: 1(-0.545,0) 2(0.545,0)
  silkscreen extent -1.17,-0.5 1.17,0.5, body extent -0.52,-0.27 0.52,0.26, height 0.53
C0402#2 [mm] "cap"
  rect 0.79x0.54 smd paste+0 mask+0.051: 1(-0.545,0) 2(0.545,0)
  silkscreen extent -1.17,-0.5 1.17,0.5, body extent -0.52,-0.27 0.52,0.26, height 0.53
C0603 [mm] "cap 0603"
  rect 0.8x0.9 smd paste+0 mask+0.051: 1(-0.7,0) 2(0.7,0)
  silkscreen extent -1.41,-0.77 1.42,0.76, body extent -0.81,-0.4 0.79,0.4, height 0.8
CCSP-491_L14.0-W14.0-TL_RV1126B [mm]
  round 0.2 smd paste-100 mask+0.05: A1(-6.51,6.51) A1-2(-5,5.5) A1-4(-4,5.5) A1-6(-3,5.5) A1-8(-2,5.5) A1-10(-1,5.5) A1-12(0,5.5) A1-14(1,5.5) A1-16(2,5.5) A1-18(3,5.5) A1-20(4,5.5) A1-22(5,5.5) A2(-6.09,6.51) A2-1(-3.9,3.9) A2-2(-3.25,3.9) A2-3(-2.6,3.9) A2-4(-1.95,3.9) A2-5(-1.3,3.9) A2-6(-0.65,3.9) A2-7(0,3.9) A2-8(0.65,3.9) A2-9(1.3,3.9) A2-10(1.95,3.9) A2-11(2.6,3.9) A2-12(3.25,3.9) A2-13(3.9,3.9) A4(-5.25,6.51) A5(-4.83,6.51) A7(-3.99,6.51) A8(-3.57,6.51) A10(-2.73,6.51) A11(-2.31,6.51) A13(-1.47,6.51) A14(-1.05,6.51) A16(-0.21,6.51) A17(0.21,6.51) A19(1.05,6.51) A20(1.47,6.51) A22(2.31,6.51) A23(2.73,6.51) A25(3.57,6.51) A26(3.99,6.51) A28(4.83,6.51) A29(5.25,6.51) A31(6.09,6.51) A32(6.51,6.51) AA1(-6.51,-1.89) AA1-2(-5,-4.5) AA1-4(-4,-4.5) AA1-6(-3,-4.5) AA1-8(-2,-4.5) AA1-10(-1,-4.5) AA1-12(0,-4.5) AA1-14(1,-4.5) AA1-16(2,-4.5) AA1-18(3,-4.5) AA1-20(4,-4.5) AA1-22(5,-4.5) AA2(-6.09,-1.89) AA31(6.09,-1.89) AA32(6.51,-1.89) AB1(-6.51,-2.31) AB1-2(-5,-5) AB1-4(-4,-5) AB1-6(-3,-5) AB1-8(-2,-5) AB1-10(-1,-5) AB1-12(0,-5) AB1-14(1,-5) AB1-16(2,-5) AB1-18(3,-5) AB1-20(4,-5) AB1-22(5,-5) AB2(-6.09,-2.31) AB31(6.09,-2.31) AC1-2(-5,-5.5) AC1-4(-4,-5.5) AC1-6(-3,-5.5) AC1-8(-2,-5.5) AC1-10(-1,-5.5) AC1-12(0,-5.5) AC1-14(1,-5.5) AC1-16(2,-5.5) AC1-18(3,-5.5) AC1-20(4,-5.5) AC1-22(5,-5.5) AC2(-6.09,-2.73) AC31(6.09,-2.73) AC32(6.51,-2.73) AD1(-6.51,-3.15) AD2(-6.09,-3.15) AD31(6.09,-3.15) AD32(6.51,-3.15) AE1(-6.51,-3.57) AE2(-6.09,-3.57) AE31(6.09,-3.57) AF2(-6.09,-3.99) AF31(6.09,-3.99) AF32(6.51,-3.99) AG1(-6.51,-4.41) AG2(-6.09,-4.41) AG31(6.09,-4.41) AG32(6.51,-4.41) AH1(-6.51,-4.83) AH2(-6.09,-4.83) AH31(6.09,-4.83) AJ2(-6.09,-5.25) AJ31(6.09,-5.25) AJ32(6.51,-5.25) AK1(-6.51,-5.67) AK2(-6.09,-5.67) AK31(6.09,-5.67) AK32(6.51,-5.67) AL1(-6.51,-6.09) AL2(-6.09,-6.09) AL3(-5.67,-6.09) AL4(-5.25,-6.09) AL5(-4.83,-6.09) AL6(-4.41,-6.09) AL7(-3.99,-6.09) AL8(-3.57,-6.09) AL9(-3.15,-6.09) AL10(-2.73,-6.09) AL11(-2.31,-6.09) AL12(-1.89,-6.09) AL13(-1.47,-6.09) AL14(-1.05,-6.09) AL15(-0.63,-6.09) AL16(-0.21,-6.09) AL17(0.21,-6.09) AL18(0.63,-6.09) AL19(1.05,-6.09) AL20(1.47,-6.09) AL21(1.89,-6.09) AL22(2.31,-6.09) AL23(2.73,-6.09) AL24(3.15,-6.09) AL25(3.57,-6.09) AL26(3.99,-6.09) AL27(4.41,-6.09) AL28(4.83,-6.09) AL29(5.25,-6.09) AL30(5.67,-6.09) AL31(6.09,-6.09) AL32(6.51,-6.09) AM1(-6.51,-6.51) AM2(-6.09,-6.51) AM4(-5.25,-6.51) AM5(-4.83,-6.51) AM7(-3.99,-6.51) AM8(-3.57,-6.51) AM10(-2.73,-6.51) AM11(-2.31,-6.51) AM13(-1.47,-6.51) AM14(-1.05,-6.51) AM16(-0.21,-6.51) AM17(0.21,-6.51) AM19(1.05,-6.51) AM20(1.47,-6.51) AM22(2.31,-6.51) AM23(2.73,-6.51) AM25(3.57,-6.51) AM26(3.99,-6.51) AM28(4.83,-6.51) AM29(5.25,-6.51) AM31(6.09,-6.51) AM32(6.51,-6.51) B1(-6.51,6.09) B1-2(-5,5) B1-4(-4,5) B1-6(-3,5) B1-8(-2,5) B1-10(-1,5) B1-12(0,5) B1-14(1,5) B1-16(2,5) B1-18(3,5) B1-20(4,5) B1-22(5,5) B2(-6.09,6.09) B2-1(-3.9,3.25) B2-2(-3.25,3.25) B2-3(-2.6,3.25) B2-4(-1.95,3.25) B2-5(-1.3,3.25) B2-6(-0.65,3.25) B2-7(0,3.25) B2-8(0.65,3.25) B2-9(1.3,3.25) B2-10(1.95,3.25) B2-11(2.6,3.25) B2-12(3.25,3.25) B2-13(3.9,3.25) B3(-5.67,6.09) B4(-5.25,6.09) B5(-4.83,6.09) B6(-4.41,6.09) B7(-3.99,6.09) B8(-3.57,6.09) B9(-3.15,6.09) B10(-2.73,6.09) B11(-2.31,6.09) B12(-1.89,6.09) B13(-1.47,6.09) B14(-1.05,6.09) B15(-0.63,6.09) B16(-0.21,6.09) B17(0.21,6.09) B18(0.63,6.09) B19(1.05,6.09) B20(1.47,6.09) B21(1.89,6.09) B22(2.31,6.09) B23(2.73,6.09) B24(3.15,6.09) B25(3.57,6.09) B26(3.99,6.09) B27(4.41,6.09) B28(4.83,6.09) B29(5.25,6.09) B30(5.67,6.09) B31(6.09,6.09) B32(6.51,6.09) C1(-6.51,5.67) C1-2(-5,4.5) C1-4(-4,4.5) C1-6(-3,4.5) C1-8(-2,4.5) C1-10(-1,4.5) C1-12(0,4.5) C1-14(1,4.5) C1-16(2,4.5) C1-18(3,4.5) C1-20(4,4.5) C1-22(5,4.5) C2(-6.09,5.67) C2-1(-3.9,2.6) C2-2(-3.25,2.6) C2-3(-2.6,2.6) C2-4(-1.95,2.6) C2-5(-1.3,2.6) C2-6(-0.65,2.6) C2-7(0,2.6) C2-8(0.65,2.6) C2-9(1.3,2.6) C2-10(1.95,2.6) C2-11(2.6,2.6) C2-12(3.25,2.6) C2-13(3.9,2.6) C31(6.09,5.67) C32(6.51,5.67) D1(-6.51,5.25) D1-1(-5.5,4) D1-2(-5,4) D1-3(-4.5,4) D1-21(4.5,4) D1-22(5,4) D1-23(5.5,4) D2(-6.09,5.25) D2-1(-3.9,1.95) D2-2(-3.25,1.95) D2-3(-2.6,1.95) D2-4(-1.95,1.95) D2-5(-1.3,1.95) D2-6(-0.65,1.95) D2-7(0,1.95) D2-8(0.65,1.95) D2-9(1.3,1.95) D2-10(1.95,1.95) D2-11(2.6,1.95) D2-12(3.25,1.95) D2-13(3.9,1.95) D31(6.09,5.25) E2(-6.09,4.83) E2-1(-3.9,1.3) E2-2(-3.25,1.3) E2-3(-2.6,1.3) E2-4(-1.95,1.3) E2-5(-1.3,1.3) E2-6(-0.65,1.3) E2-7(0,1.3) E2-8(0.65,1.3) E2-9(1.3,1.3) E2-10(1.95,1.3) E2-11(2.6,1.3) E2-12(3.25,1.3) E2-13(3.9,1.3) E31(6.09,4.83) E32(6.51,4.83) F1(-6.51,4.41) F1-1(-5.5,3) F1-2(-5,3) F1-3(-4.5,3) F1-21(4.5,3) F1-22(5,3) F1-23(5.5,3) F2(-6.09,4.41) F2-1(-3.9,0.65) F2-2(-3.25,0.65) F2-3(-2.6,0.65) F2-4(-1.95,0.65) F2-5(-1.3,0.65) F2-6(-0.65,0.65) F2-7(0,0.65) F2-8(0.65,0.65) F2-9(1.3,0.65) F2-10(1.95,0.65) F2-11(2.6,0.65) F2-12(3.25,0.65) F2-13(3.9,0.65) F31(6.09,4.41) F32(6.51,4.41) G1(-6.51,3.99) G2(-6.09,3.99) G2-1(-3.9,0) G2-2(-3.25,0) G2-3(-2.6,0) G2-4(-1.95,0) G2-5(-1.3,0) G2-6(-0.65,0) G2-7(0,0) G2-8(0.65,0) G2-9(1.3,0) G2-10(1.95,0) G2-11(2.6,0) G2-12(3.25,0) G2-13(3.9,0) G31(6.09,3.99) H1-1(-5.5,2) H1-2(-5,2) H1-3(-4.5,2) H1-21(4.5,2) H1-22(5,2) H1-23(5.5,2) H2(-6.09,3.57) H2-1(-3.9,-0.65) H2-2(-3.25,-0.65) H2-3(-2.6,-0.65) H2-4(-1.95,-0.65) H2-5(-1.3,-0.65) H2-6(-0.65,-0.65) H2-7(0,-0.65) H2-8(0.65,-0.65) H2-9(1.3,-0.65) H2-10(1.95,-0.65) H2-11(2.6,-0.65) H2-12(3.25,-0.65) H2-13(3.9,-0.65) H31(6.09,3.57) H32(6.51,3.57) J1(-6.51,3.15) J2(-6.09,3.15) J2-1(-3.9,-1.3) J2-2(-3.25,-1.3) J2-3(-2.6,-1.3) J2-4(-1.95,-1.3) J2-5(-1.3,-1.3) J2-6(-0.65,-1.3) J2-7(0,-1.3) J2-8(0.65,-1.3) J2-9(1.3,-1.3) J2-10(1.95,-1.3) J2-11(2.6,-1.3) J2-12(3.25,-1.3) J2-13(3.9,-1.3) J31(6.09,3.15) J32(6.51,3.15) K1(-6.51,2.73) K1-1(-5.5,1) K1-2(-5,1) K1-3(-4.5,1) K1-21(4.5,1) K1-22(5,1) K1-23(5.5,1) K2(-6.09,2.73) K2-1(-3.9,-1.95) K2-2(-3.25,-1.95) K2-3(-2.6,-1.95) K2-4(-1.95,-1.95) K2-5(-1.3,-1.95) K2-6(-0.65,-1.95) K2-7(0,-1.95) K2-8(0.65,-1.95) K2-9(1.3,-1.95) K2-10(1.95,-1.95) K2-11(2.6,-1.95) K2-12(3.25,-1.95) K2-13(3.9,-1.95) K31(6.09,2.73) L2(-6.09,2.31) L2-1(-3.9,-2.6) L2-2(-3.25,-2.6) L2-3(-2.6,-2.6) L2-4(-1.95,-2.6) L2-5(-1.3,-2.6) L2-6(-0.65,-2.6) L2-7(0,-2.6) L2-8(0.65,-2.6) L2-9(1.3,-2.6) L2-10(1.95,-2.6) L2-11(2.6,-2.6) L2-12(3.25,-2.6) L2-13(3.9,-2.6) L31(6.09,2.31) L32(6.51,2.31) M1(-6.51,1.89) M1-1(-5.5,0) M1-2(-5,0) M1-3(-4.5,0) M1-21(4.5,0) M1-22(5,0) M1-23(5.5,0) M2(-6.09,1.89) M2-1(-3.9,-3.25) M2-2(-3.25,-3.25) M2-3(-2.6,-3.25) M2-4(-1.95,-3.25) M2-5(-1.3,-3.25) M2-6(-0.65,-3.25) M2-7(0,-3.25) M2-8(0.65,-3.25) M2-9(1.3,-3.25) M2-10(1.95,-3.25) M2-11(2.6,-3.25) M2-12(3.25,-3.25) M2-13(3.9,-3.25) M31(6.09,1.89) M32(6.51,1.89) N1(-6.51,1.47) N2(-6.09,1.47) N2-1(-3.9,-3.9) N2-2(-3.25,-3.9) N2-3(-2.6,-3.9) N2-4(-1.95,-3.9) N2-5(-1.3,-3.9) N2-6(-0.65,-3.9) N2-7(0,-3.9) N2-8(0.65,-3.9) N2-9(1.3,-3.9) N2-10(1.95,-3.9) N2-11(2.6,-3.9) N2-12(3.25,-3.9) N2-13(3.9,-3.9) N31(6.09,1.47) P1-1(-5.5,-1) P1-2(-5,-1) P1-3(-4.5,-1) P1-21(4.5,-1) P1-22(5,-1) P1-23(5.5,-1) P2(-6.09,1.05) P31(6.09,1.05) P32(6.51,1.05) R1(-6.51,0.63) R2(-6.09,0.63) R31(6.09,0.63) R32(6.51,0.63) T1(-6.51,0.21) T1-1(-5.5,-2) T1-2(-5,-2) T1-3(-4.5,-2) T1-21(4.5,-2) T1-22(5,-2) T1-23(5.5,-2) T2(-6.09,0.21) T31(6.09,0.21) U2(-6.09,-0.21) U31(6.09,-0.21) U32(6.51,-0.21) V1(-6.51,-0.63) V1-1(-5.5,-3) V1-2(-5,-3) V1-3(-4.5,-3) V1-21(4.5,-3) V1-22(5,-3) V1-23(5.5,-3) V2(-6.09,-0.63) V31(6.09,-0.63) V32(6.51,-0.63) W1(-6.51,-1.05) W2(-6.09,-1.05) W31(6.09,-1.05) Y1-1(-5.5,-4) Y1-2(-5,-4) Y1-3(-4.5,-4) Y1-21(4.5,-4) Y1-22(5,-4) Y1-23(5.5,-4) Y2(-6.09,-1.47) Y31(6.09,-1.47) Y32(6.51,-1.47)
  silkscreen extent -7.31,-7.08 7.08,7.3, body extent -6.99,-6.99 7.01,7.01, height 0.9
CONN-SMD_4P-P1.25_SM04B-GHS-TB-LF-SN [mm]
  rect 0.6x1.7 smd paste+0 mask+0.051: 1(-1.876,1.6) 2(-0.626,1.6) 3(0.624,1.6) 4(1.875,1.6)
  rect 1x2.7 smd paste+0 mask+0.051: 5(3.725,-1.6) 6(-3.725,-1.6)
  silkscreen extent -4.27,-2.7 4.28,1.69, body extent -4.11,-2.65 4.14,2.2, height 4.35
CONN-SMD_4P-P2.00_WTBA0-BH004 [mm]
  rect 1.2x3.2 smd paste+0 mask+0.05: 1(3,-2.725) 2(1,-2.725) 3(-1,-2.725) 4(-3,-2.725)
  rect 1.7x5.3 smd paste+0 mask+0.05: 5(5.565,2.725) 6(-5.565,2.725)
  silkscreen extent -6.25,-3.73 6.25,5.67, body extent -5.99,-3.75 6.01,5.65, height 6.46
CONN-SMD_30P-P0.50_HRS_DF12NB-3.0-30DP-0.5V [mm]
  rect 0.3x1.6 smd paste+0 mask+0.051: 1(-3.5,-1.994) 2(-3.5,2.006) 3(-3,-1.994) 4(-3,2.006) 5(-2.5,-1.994) 6(-2.5,2.006) 7(-2,-1.994) 8(-2,2.006) 9(-1.5,-1.994) 10(-1.5,2.006) 11(-1,-1.994) 12(-1,2.006) 13(-0.5,-1.994) 14(-0.5,2.006) 15(0,-1.994) 16(0,2.006) 17(0.5,-1.994) 18(0.5,2.006) 19(1,-1.994) 20(1,2.006) 21(1.5,-1.994) 22(1.5,2.006) 23(2,-1.994) 24(2,2.006) 25(2.5,-1.994) 26(2.5,2.006) 27(3,-1.994) 28(3,2.006) 29(3.5,-1.994) 30(3.5,2.006)
  rect 0.8x1.8 smd paste+0 mask+0.051: 31(5.25,0.006) 32(-5.25,0.006)
  silkscreen extent -4.85,-3.1 4.85,2.01, body extent -5.34,-2.24 5.26,2.36, height 2.3
CONN-SMD_1051620101 [mm]
  rect 2.91x0.55 smd paste+0 mask+0.05: 0(-2.07,3.83) 0(2.12,3.859)
  rect 0.5x1 smd paste+0 mask+0.05: 1(3.575,-3.471) 2(2.474,-3.471) 3(1.374,-3.471) 4(0.275,-3.471) 5(-0.825,-3.471) 6(-1.926,-3.471) 7(-3.025,-3.471) 8(-4.125,-3.471)
  rect 0.72x0.78 smd paste+0 mask+0.05: 9(5.413,-0.791)
  rect 1.05x1.08 smd paste+0 mask+0.05: G1(5.413,0.479)
  rect 1.05x1.199 smd paste+0 mask+0.05: G2(5.413,3.089) G3(-5.363,2.519)
  rect 1.05x2.39 smd paste+0 mask+0.05: G4(-5.363,-0.661)
  silkscreen extent -5.84,-3.08 5.84,4.01, body extent -5.65,-3.63 5.65,3.97, height 1.48
CRYSTAL-SMD_4P-L2.0-W1.6-BL [mm] "SMD2016"
  rect 0.9x0.8 smd paste+0 mask+0.051: 1(-0.7,-0.55) 2(0.7,-0.55) 3(0.7,0.55) 4(-0.7,0.55)
  silkscreen extent -1.63,-1.4 1.42,1.23, body extent -1,-0.8 1,0.8, height 0.45
DSN0603-2_L0.7-W0.3-P0.40-BI [mm] "DSN0603"
  rect 0.15x0.25 smd paste+0 mask+0.051: 1(-0.2,0) 2(0.2,0)
  silkscreen extent -0.52,-0.38 0.51,0.38, body extent -0.3,-0.15 0.3,0.15, height 0.33
FBGA-153_L13.0-W11.5-P0.50_KLMAG1JETD-B041 [mm]
  round 0.25 smd paste-100 mask+0.05: A1(-3.25,3.25) A2(-2.75,3.25) A3(-2.25,3.25) A4(-1.75,3.25) A5(-1.25,3.25) A6(-0.75,3.25) A7(-0.25,3.25) A8(0.25,3.25) A9(0.75,3.25) A10(1.25,3.25) A11(1.75,3.25) A12(2.25,3.25) A13(2.75,3.25) A14(3.25,3.25) B1(-3.25,2.75) B2(-2.75,2.75) B3(-2.25,2.75) B4(-1.75,2.75) B5(-1.25,2.75) B6(-0.75,2.75) B7(-0.25,2.75) B8(0.25,2.75) B9(0.75,2.75) B10(1.25,2.75) B11(1.75,2.75) B12(2.25,2.75) B13(2.75,2.75) B14(3.25,2.75) C1(-3.25,2.25) C2(-2.75,2.25) C3(-2.25,2.25) C4(-1.75,2.25) C5(-1.25,2.25) C6(-0.75,2.25) C7(-0.25,2.25) C8(0.25,2.25) C9(0.75,2.25) C10(1.25,2.25) C11(1.75,2.25) C12(2.25,2.25) C13(2.75,2.25) C14(3.25,2.25) D1(-3.25,1.75) D2(-2.75,1.75) D3(-2.25,1.75) D4(-1.75,1.75) D12(2.25,1.75) D13(2.75,1.75) D14(3.25,1.75) E1(-3.25,1.25) E2(-2.75,1.25) E3(-2.25,1.25) E5(-1.25,1.25) E6(-0.75,1.25) E7(-0.25,1.25) E8(0.25,1.25) E9(0.75,1.25) E10(1.25,1.25) E12(2.25,1.25) E13(2.75,1.25) E14(3.25,1.25) F1(-3.25,0.75) F2(-2.75,0.75) F3(-2.25,0.75) F5(-1.25,0.75) F10(1.25,0.75) F12(2.25,0.75) F13(2.75,0.75) F14(3.25,0.75) G1(-3.25,0.25) G2(-2.75,0.25) G3(-2.25,0.25) G5(-1.25,0.25) G10(1.25,0.25) G12(2.25,0.25) G13(2.75,0.25) G14(3.25,0.25) H1(-3.25,-0.25) H2(-2.75,-0.25) H3(-2.25,-0.25) H5(-1.25,-0.25) H10(1.25,-0.25) H12(2.25,-0.25) H13(2.75,-0.25) H14(3.25,-0.25) J1(-3.25,-0.75) J2(-2.75,-0.75) J3(-2.25,-0.75) J5(-1.25,-0.75) J10(1.25,-0.75) J12(2.25,-0.75) J13(2.75,-0.75) J14(3.25,-0.75) K1(-3.25,-1.25) K2(-2.75,-1.25) K3(-2.25,-1.25) K5(-1.25,-1.25) K6(-0.75,-1.25) K7(-0.25,-1.25) K8(0.25,-1.25) K9(0.75,-1.25) K10(1.25,-1.25) K12(2.25,-1.25) K13(2.75,-1.25) K14(3.25,-1.25) L1(-3.25,-1.75) L2(-2.75,-1.75) L3(-2.25,-1.75) L12(2.25,-1.75) L13(2.75,-1.75) L14(3.25,-1.75) M1(-3.25,-2.25) M2(-2.75,-2.25) M3(-2.25,-2.25) M4(-1.75,-2.25) M5(-1.25,-2.25) M6(-0.75,-2.25) M7(-0.25,-2.25) M8(0.25,-2.25) M9(0.75,-2.25) M10(1.25,-2.25) M11(1.75,-2.25) M12(2.25,-2.25) M13(2.75,-2.25) M14(3.25,-2.25) N1(-3.25,-2.75) N2(-2.75,-2.75) N3(-2.25,-2.75) N4(-1.75,-2.75) N5(-1.25,-2.75) N6(-0.75,-2.75) N7(-0.25,-2.75) N8(0.25,-2.75) N9(0.75,-2.75) N10(1.25,-2.75) N11(1.75,-2.75) N12(2.25,-2.75) N13(2.75,-2.75) N14(3.25,-2.75) P1(-3.25,-3.25) P2(-2.75,-3.25) P3(-2.25,-3.25) P4(-1.75,-3.25) P5(-1.25,-3.25) P6(-0.75,-3.25) P7(-0.25,-3.25) P8(0.25,-3.25) P9(0.75,-3.25) P10(1.25,-3.25) P11(1.75,-3.25) P12(2.25,-3.25) P13(2.75,-3.25) P14(3.25,-3.25)
  silkscreen extent -5.84,-6.61 5.84,6.5, body extent -5.75,-6.5 5.75,6.5, height 0.7
FPC-SMD_FH35C-41S-0.3SHW-50 [mm]
  rect 0.3x0.85 smd paste+0 mask+0.051: 1(6,-1.475) 2(5.7,1.5) 3(5.4,-1.475) 4(5.1,1.5) 5(4.8,-1.475) 6(4.5,1.5) 7(4.2,-1.475) 8(3.9,1.5) 9(3.6,-1.475) 10(3.3,1.5) 11(3,-1.5) 12(2.7,1.5) 13(2.4,-1.475) 14(2.1,1.5) 15(1.8,-1.475) 16(1.5,1.5) 17(1.2,-1.475) 18(0.9,1.5) 19(0.6,-1.475) 20(0.3,1.5) 21(0,-1.475) 22(-0.3,1.5) 23(-0.6,-1.475) 24(-0.9,1.5) 25(-1.2,-1.475) 26(-1.5,1.5) 27(-1.8,-1.475) 28(-2.1,1.5) 29(-2.4,-1.475) 30(-2.7,1.5) 31(-3,-1.475) 32(-3.3,1.5) 33(-3.6,-1.475) 34(-3.9,1.5) 35(-4.2,-1.475) 36(-4.5,1.5) 37(-4.8,-1.475) 38(-5.1,1.5) 39(-5.4,-1.475) 40(-5.7,1.5) 41(-6,-1.475)
  rect 0.4x0.95 smd paste+0 mask+0.051: 42(-6.7,-1.2) 43(6.7,-1.2)
  silkscreen extent -6.95,-0.43 6.95,2.6, body extent -6.94,-1.62 6.96,2.58, height 0.94
HDR-TH_4P-P1.27-V-M [mm]
  rect 1x1 hole 0.6 paste-2539.97 mask+0.051: 1(-1.905,0)
  round 1 hole 0.6 paste-2539.97 mask+0.051: 2(-0.635,0) 3(0.635,0) 4(1.905,0)
  silkscreen extent -2.54,-1 2.54,1
IND_1008 [mm] "Inductor"
  rect 1.24x2.22 smd: 1(-1.09,0) 2(1.09,0)
  silkscreen extent -1.98,-1.39 1.99,1.4, body extent -1.46,-1.39 1.46,1.4, height 2.01
KEY-SMD_B3U-1000PM [mm]
  rect 0.8x1.7 smd paste+0 mask+0.051: 1(-1.7,0) 2(1.7,0)
  silkscreen extent -1.5,-1.25 1.5,1.25, body extent -2,-1.25 2,1.25, height 1.75
PowerPAK_1212-8_SMD [mm] "Mosfet"
  rect 0.99x0.405 smd: 1(-0.996,0.99) 2(-0.996,0.33) 3(-0.996,-0.33) 4(-0.996,-0.99)
  rect 0.5x0.5 smd paste-1 mask+0: 5(0.996,0)
  L1-TOP region: 2.369,0.787 1.859,0.787 1.859,0.533 2.369,0.533 2.369,0.128 1.859,0.128 1.859,-0.128 2.369,-0.128 2.369,-0.533 1.859,-0.533 1.859,-0.787 2.369,-0.787 2.369,-1.195 1.609,-1.195 1.609,-1.118 0.134,-1.118 0.134,1.118 1.609,1.118 1.609,1.195 2.369,1.195
  silkscreen extent -1.09,-1.53 1.96,1.53, body extent -1.16,-1.68 2.14,1.62, height 1.05
QFN-28_L4.0-W4.0-P0.40-TL-EP2.4 [mm]
  rect 0.85x0.2 smd paste+0 mask+0.05: 1(-2,1.2) 2(-2,0.8) 3(-2,0.4) 4(-2,0.001) 5(-2,-0.4) 6(-2,-0.8) 7(-2,-1.2) 15(2,-1.2) 16(2,-0.8) 17(2,-0.4) 18(2,0) 19(2,0.4) 20(2,0.8) 21(2,1.2)
  rect 0.2x0.85 smd paste+0 mask+0.05: 8(-1.2,-2) 9(-0.8,-2) 10(-0.4,-2) 11(0,-2) 12(0.399,-2) 13(0.8,-2) 14(1.2,-2) 22(1.2,2) 23(0.8,2) 24(0.4,2) 25(0,2) 26(-0.4,2) 27(-0.8,2) 28(-1.2,2)
  rect 2.4x2.4 smd paste+0 mask+0.05: 29(0,0)
  silkscreen extent -2.78,-2 2,2, body extent -2.5,-2.51 2.5,2.49, height 0.87
R0201 [mm]
  rect 0.38x0.4 smd mask+0.05: 1(-0.28,0) 2(0.28,0)
  silkscreen extent -0.64,-0.36 0.63,0.36, body extent -0.34,-0.16 0.34,0.17, height 0.35
R0402 [mm] "0402"
  rect 0.566x0.54 smd paste-100 mask+0.051: 1(-0.433,0) 2(0.433,0)
  silkscreen extent -0.94,-0.5 0.94,0.5, body extent -0.54,-0.27 0.53,0.28, height 0.41
"SCREW 3.0" [mm] "M3"
  round 4 hole 3.2 mask+0.1: 1(0,0)
SOT-23-3_L2.9-W1.3-P1.90-LS2.4-BR [mm]
  rect 1x0.65 smd paste+0 mask+0.051: 1(1,-0.95) 2(1,0.95) 3(-1,0)
  silkscreen extent -0.73,-1.53 0.73,1.53, body extent -1.21,-1.5 1.09,1.5, height 1.3
SOT-23-5_L3.0-W1.7-P0.95-LS2.8-BR [mm] "SOT 23-5"
  rect 1.1x0.6 smd paste+0 mask+0.051: 1(1.3,-0.95) 2(1.3,0) 3(1.3,0.95) 4(-1.3,0.95) 5(-1.3,-0.95)
  silkscreen extent -0.9,-1.55 0.9,1.55, body extent -1.42,-1.5 1.42,1.5, height 1.22
WQFN-40_L5.0-W5.0-P0.4-BL-EP [mm]
  oval 0.2x0.8 smd paste+0 mask+0.05: 1(-1.801,-2.499) 2(-1.4,-2.499) 3(-1.001,-2.499) 4(-0.599,-2.499) 5(-0.201,-2.499) 6(0.201,-2.499) 7(0.599,-2.499) 8(1.001,-2.499) 9(1.4,-2.499) 10(1.801,-2.499) 21(1.801,2.499) 22(1.4,2.499) 23(1.001,2.499) 24(0.599,2.499) 25(0.201,2.499) 26(-0.201,2.499) 27(-0.599,2.499) 28(-1.001,2.499) 29(-1.4,2.499) 30(-1.801,2.499)
  oval 0.8x0.2 smd paste+0 mask+0.05: 11(2.499,-1.801) 12(2.499,-1.4) 13(2.499,-1.001) 14(2.499,-0.599) 15(2.499,-0.201) 16(2.499,0.201) 17(2.499,0.599) 18(2.499,1.001) 19(2.499,1.4) 20(2.499,1.801) 31(-2.499,1.801) 32(-2.499,1.4) 33(-2.499,1.001) 34(-2.499,0.599) 35(-2.499,0.201) 36(-2.499,-0.201) 37(-2.499,-0.599) 38(-2.499,-1.001) 39(-2.499,-1.4) 40(-2.499,-1.801)
  rect 3.8x3.8 smd paste+0 mask+0.05: 41(0,0)
  silkscreen extent -2.7,-3.18 2.7,2.7, body extent -2.46,-2.5 2.54,2.5, height 0.9
X1SON-2_L1.0-W0.6-P0.65-BI-1 [mm]
  rect 0.6x0.6 smd paste+0 mask+0.051: 1(-0.5,0) 2(0.5,0)
  silkscreen extent -0.5,-0.53 0.5,0.53, body extent -0.52,-0.3 0.5,0.3, height 0.47